# EAGLE board 25 (EAGLE 9.7.0)
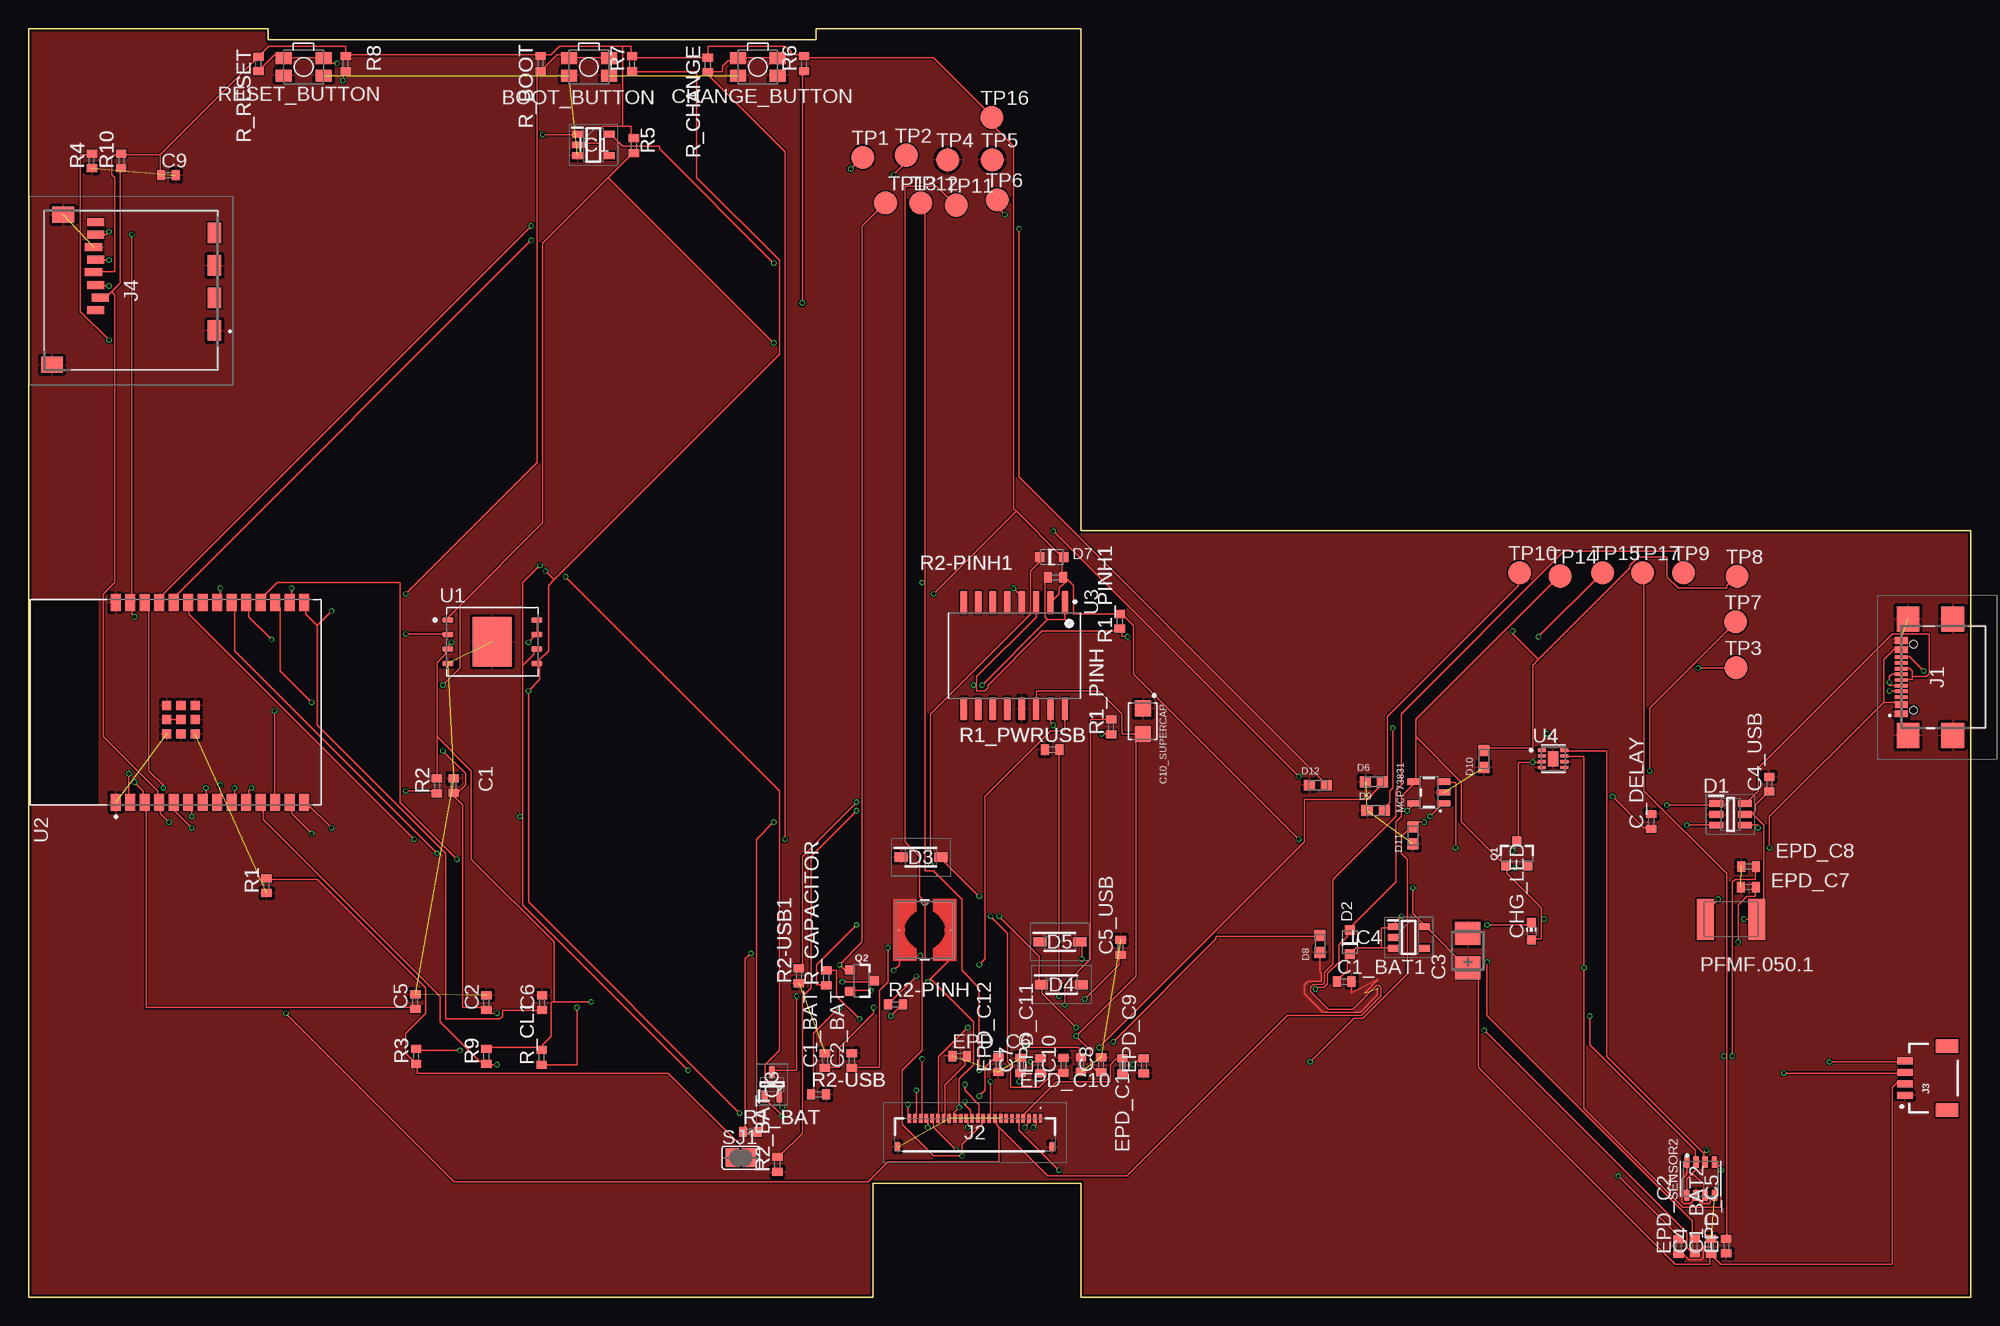
[diagram p0: board, top side]
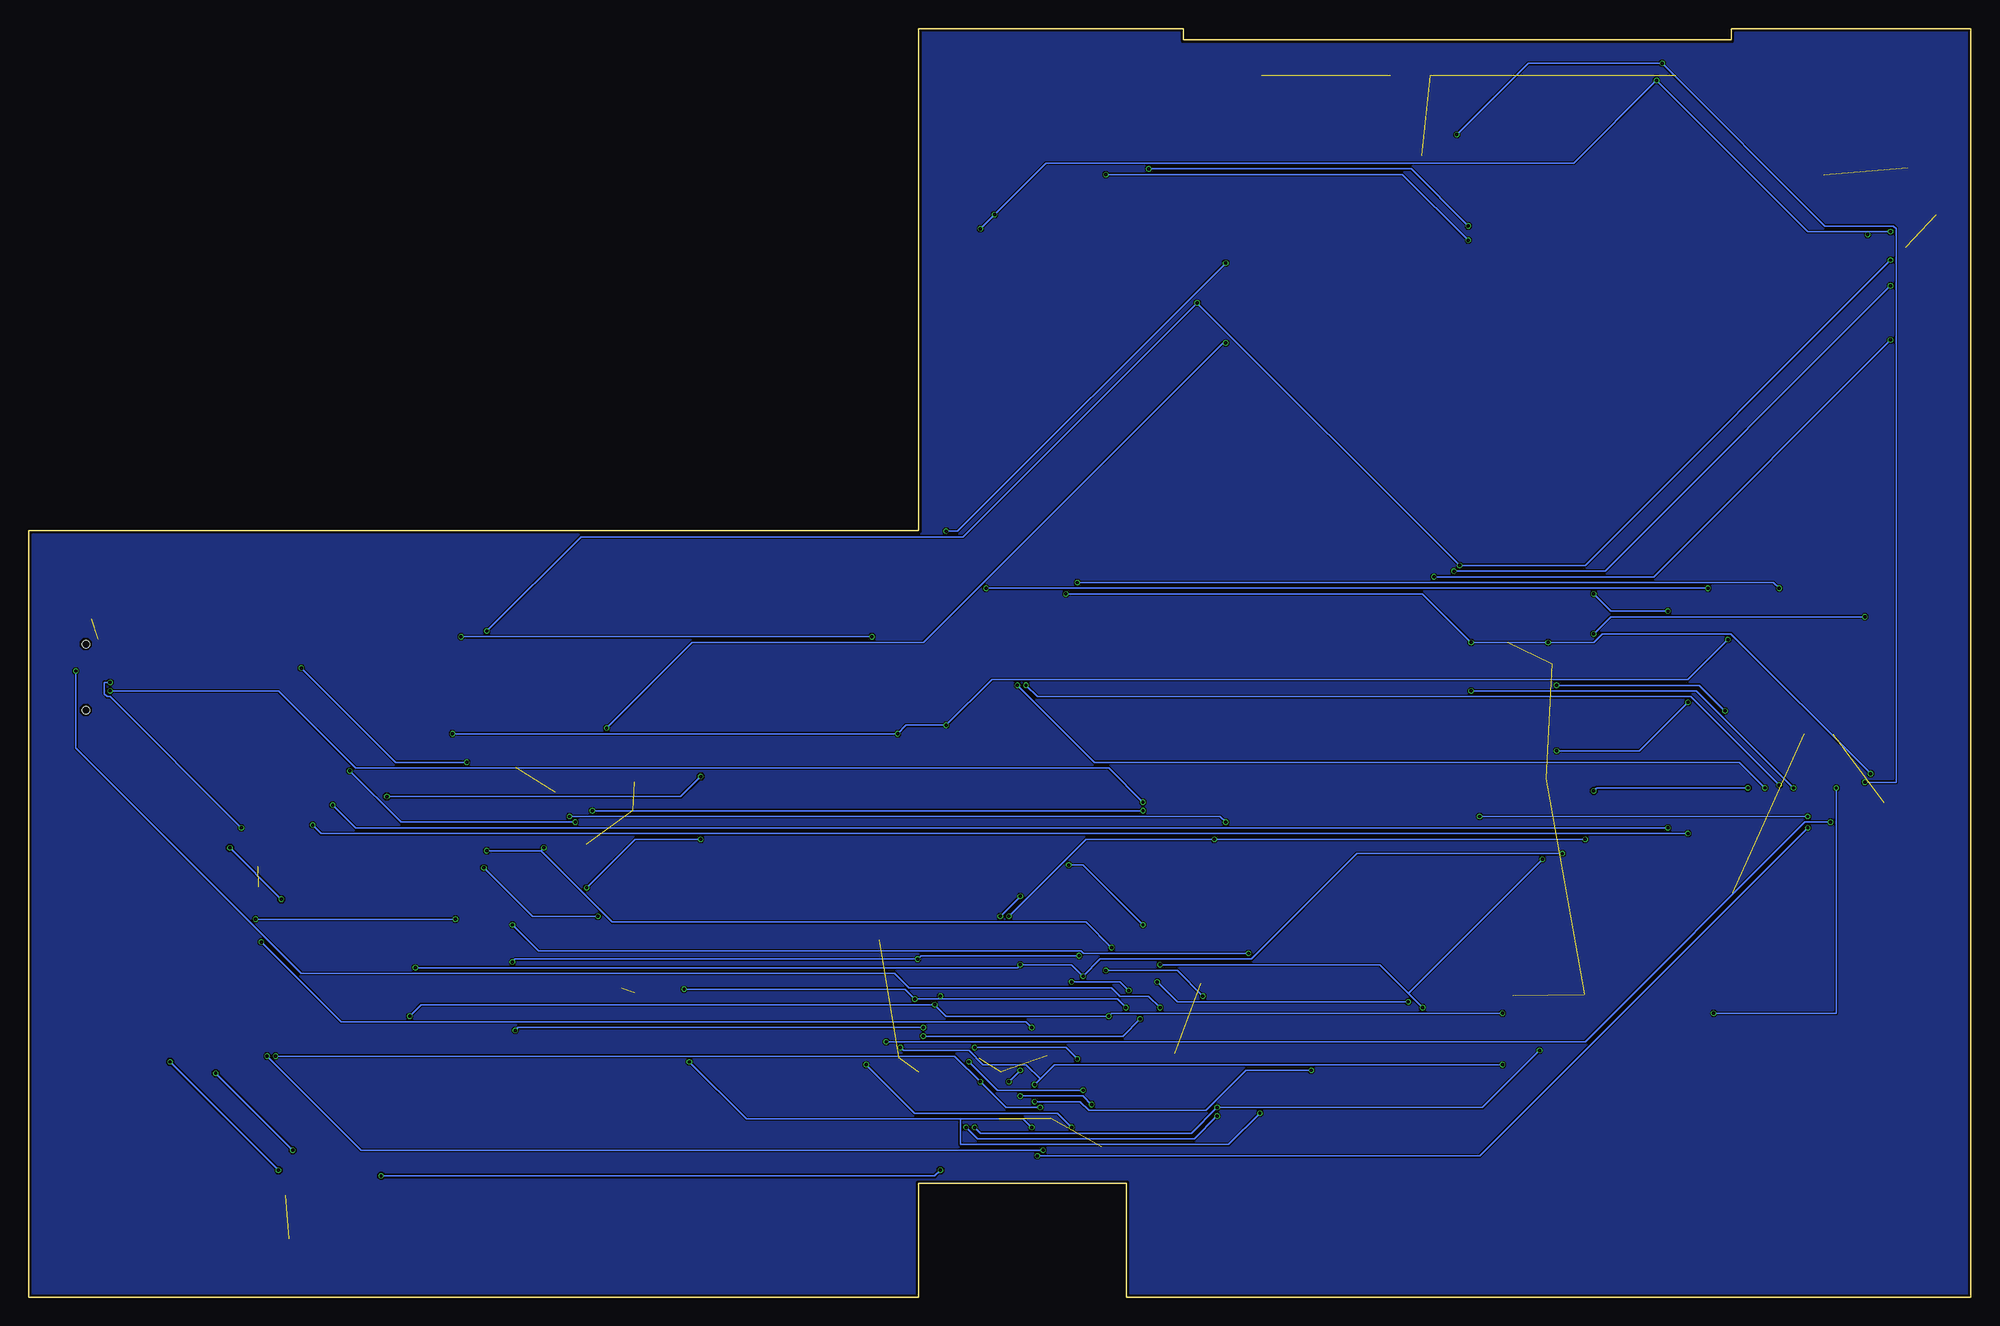
[diagram p1: board, bottom side, seen from below]

Size 170.2 x 111.2 mm. Coordinates in mm from the lower left corner, seen from the top.
Outline: 92.2,111.2 92.2,67.2 170.2,67.2 170.2,0 92.2,0 92.2,10 74,10 74,0 0,0 0,111.2 21,111.2 21,110.2 69,110.2 69,111.2 92.2,111.2
Copper layers (1*16): Top / Bottom
Stack-up Default Layer Stack: Top User Defined 0.035mm / Dielectric-1 User Defined 1.6mm / Bottom User Defined 0.035mm
Design rules: minimum copper width 5mil, minimum drill size 0.3mm, copper clearance wire_polygon to wire_polygon 5mil, copper clearance wire_polygon to pad_smd 5mil, copper clearance wire_polygon to via 5mil, copper clearance pad_smd to pad_smd 5mil, copper clearance pad_smd to via 5mil, copper clearance via to via 5mil, copper clearance smd to pad (same net) 5mil, copper clearance smd to via (same net) 5mil, copper clearance smd to smd (same net) 5mil, dimension clearance 0.2mm, via restrict clearance 0mil, restrict clearance 0mil, drill distance 6mil, keepout clearance 0mil

## Footprints (pad centres in the part's own frame; a part is rotated, then mirrored left to right if it is on the bottom)
MYBUTTON = smd 1.4 x 1.05: 1 1.75,0.75; 2 -1.75,0.75; 3 -1.75,-0.75; 4 1.75,-0.75
ESP32_WROVER_EAGLE-LTSPICE_C0402 = smd 0.7 x 0.9: 1 -0.65,0; 2 0.65,0
RCL_CT3528 = smd 2 x 2.2: + -1.5,0; - 1.5,0
EAGLE-LTSPICE_C0402 = smd 0.7 x 0.9: 1 -0.65,0; 2 0.65,0
CAPCP3225X100N = smd 1.4 x 1.4: 1 -1.1,0; 2 1.1,0
ADAFRUIT_CHIP-LED0603 = smd 0.8 x 0.8: A 0,-0.75; C 0,0.75
SOT95P280X145-6N = smd 1.2 x 0.6: 1 -1.25,0.95; 2 -1.25,0; 3 -1.25,-0.95; 4 1.25,-0.95; 5 1.25,0; 6 1.25,0.95
ESP32_WROVER_AVX---SD0805S020S1R0_AVX_SD0805S020S1R0_0 = smd 0.8 x 0.9: 1 -1.05,0; 2 1.05,0
SOD3716X135N = smd 1.15 x 0.8: 1 -1.75,0; 2 1.75,0
DIOC1608X36N = smd 0.97 x 0.94: 1 -0.75,0; 2 0.75,0
SOT95P280X125-5N = smd 0.9 x 0.6: 1 -1.4,0.95; 2 -1.4,0; 3 -1.4,-0.95; 4 1.4,-0.95; 5 1.4,0.95
SOT95P280X120-5N = smd 0.9 x 0.6: 1 -1.4,0.95; 2 -1.4,0; 3 -1.4,-0.95; 4 1.4,-0.95; 5 1.4,0.95
SAMACSYS_PARTS_USB4110GFA = smd 0.3 x 1.15: A1 -3.35,3.678; A4 -2.55,3.678; A5 -1.25,3.678; A6 -0.25,3.678; A7 0.25,3.678; A8 1.25,3.678; A9 2.55,3.678; A12 3.35,3.678; B1 3.05,3.678; B4 2.25,3.678; B5 1.75,3.678; B6 0.75,3.678; B7 -0.75,3.678; B8 -1.75,3.678; B9 -2.25,3.678; B12 -3.05,3.678 | smd 2.18 x 2: MP1 -5.11,-0.827; MP2 5.11,-0.827; MP3 -5.11,3.103; MP4 5.11,3.103 | hole 0.65: -2.89,2.603; 2.89,2.603
FH34SRJ24S05SH99 = smd 0.3 x 0.8: 1 5.75,1.45; 2 5.25,1.45; 3 4.75,1.45; 4 4.25,1.45; 5 3.75,1.45; 6 3.25,1.45; 7 2.75,1.45; 8 2.25,1.45; 9 1.75,1.45; 10 1.25,1.45; 11 0.75,1.45; 12 0.25,1.45; 13 -0.25,1.45; 14 -0.75,1.45; 15 -1.25,1.45; 16 -1.75,1.45; 17 -2.25,1.45; 18 -2.75,1.45; 19 -3.25,1.45; 20 -3.75,1.45; 21 -4.25,1.45; 22 -4.75,1.45; 23 -5.25,1.45; 24 -5.75,1.45 | smd 0.4 x 0.8: MP1 6.75,-1.05; MP2 -6.75,-1.05
JST04_1MM_RA = smd 0.6 x 1.35: 1 -1.5,0; 2 -0.5,0; 3 0.5,0; 4 1.5,0 | smd 1.2 x 2: NC1 2.8,-3.675; NC2 -2.8,-3.675
112ATAARR03ATTEND = smd 1.8 x 1.2: G1 10.6,10.4; G2 4.9,10.4; S1 7.75,10.4; S2 2.05,10.4 | smd 1.4 x 1.9: G3 13.6,-3.85; G4 0.45,-2.85 | smd 0.7 x 1.5: P1 8.8,0; P2 7.7,0.4; P3 6.6,0; P4 5.5,-0.2; P5 4.4,0; P6 3.3,-0.2; P7 2.2,0; P8 1.1,0
IND_4828-WE-TPC_WRE = smd 0.127 x 0.127: 1 -2.286,0; 2 2.286,0
ESP32_WROVER_SPARKFUN-IC-POWER_SOT23-5 = smd 0.55 x 1.2: 1 -0.95,-1.3; 2 0,-1.3; 3 0.95,-1.3; 4 0.95,1.3; 5 -0.95,1.3
ESP32C6_VARISTOR_CT/CN1812 = smd 1.5 x 3.6: 1 -2.25,0; 2 2.25,0
ESP32_WROVER_SPARKFUN-DISCRETESEMI_SOT23-3 = smd 0.8 x 0.9: 1 -0.95,-1; 2 0.95,-1; 3 0,1.1
SOT65P210X110-3N = smd 1.05 x 0.5: 1 -1.05,0.65; 2 -1.05,-0.65; 3 1.05,0
ESP32_WROVER_EAGLE-LTSPICE_R0402 = smd 0.7 x 0.9: 1 -0.65,0; 2 0.65,0
ESP32_WROVER_BME680_PSON80P300X300X100-8N = smd 1.016 x 0.5: 1 1.458,1.2; 2 1.458,0.4; 3 1.458,-0.4; 4 1.458,-1.2; 5 -1.458,-1.22; 6 -1.458,-0.4; 7 -1.458,0.4; 8 -1.458,1.2
SJ = smd 1.168 x 1.6: 1 -0.762,0; 2 0.762,0
TP20R = smd 2 x 2: TP 0,0
SON127P600X800X80-9N = smd 0.94 x 0.44: 1 -3.895,1.905; 2 -3.895,0.635; 3 -3.895,-0.635; 4 -3.895,-1.905; 5 3.895,-1.905; 6 3.895,-0.635; 7 3.895,0.635; 8 3.895,1.905 | smd 3.4 x 4.3: 9 0,0
XCVR_ESP32-C6-WROOM-1-N8 = smd 1.5 x 0.9: 1 -8.75,5.26; 2 -8.75,3.99; 3 -8.75,2.72; 4 -8.75,1.45; 5 -8.75,0.18; 6 -8.75,-1.09; 7 -8.75,-2.36; 8 -8.75,-3.63; 9 -8.75,-4.9; 10 -8.75,-6.17; 11 -8.75,-7.44; 12 -8.75,-8.71; 13 -8.75,-9.98; 14 -8.75,-11.25; 15 8.75,-11.25; 16 8.75,-9.98; 17 8.75,-8.71; 18 8.75,-7.44; 19 8.75,-6.17; 20 8.75,-4.9; 21 8.75,-3.63; 22 8.75,-2.36; 23 8.75,-1.09; 24 8.75,0.18; 25 8.75,1.45; 26 8.75,2.72; 27 8.75,3.99; 28 8.75,5.26 | smd 0.8 x 0.8: 29_1 -2.755,0.79; 29_2 -1.505,0.79; 29_3 -0.255,0.79; 29_4 -2.755,-0.46; 29_5 -1.505,-0.46; 29_6 -0.255,-0.46; 29_7 -2.755,-1.71; 29_8 -1.505,-1.71; 29_9 -0.255,-1.71
SOIC127P1032X265-16N = smd 2.05 x 0.59: 1 -4.655,4.445; 2 -4.655,3.175; 3 -4.655,1.905; 4 -4.655,0.635; 5 -4.655,-0.635; 6 -4.655,-1.905; 7 -4.655,-3.175; 8 -4.655,-4.445; 9 4.655,-4.445; 10 4.655,-3.175; 11 4.655,-1.905; 12 4.655,-0.635; 13 4.655,0.635; 14 4.655,1.905; 15 4.655,3.175; 16 4.655,4.445
SON50P200X200X80-9N = smd 0.76 x 0.27: 1 -0.985,0.75; 2 -0.985,0.25; 3 -0.985,-0.25; 4 -0.985,-0.75; 5 0.985,-0.75; 6 0.985,-0.25; 7 0.985,0.25; 8 0.985,0.75 | smd 0.9 x 1.3: 9 0,0

## Placement (x,y rotation side)
BOOT_BUTTON  [MYBUTTON]  49.1,107.83 180 top
C1  100nF  [ESP32_WROVER_EAGLE-LTSPICE_C0402]  37.24,44.84 90 top
C1_BAT  4.7uF  [ESP32_WROVER_EAGLE-LTSPICE_C0402]  69.78,20.76 90 top
C1_BAT1  4.7uF  [ESP32_WROVER_EAGLE-LTSPICE_C0402]  115.28,27.68 0 top
C1_BAT2  4.7uF  [ESP32_WROVER_EAGLE-LTSPICE_C0402]  147.42,4.48 90 top
C2  100nF  [ESP32_WROVER_EAGLE-LTSPICE_C0402]  40.12,25.84 90 top
C2_BAT  4.7uF  [ESP32_WROVER_EAGLE-LTSPICE_C0402]  72.14,20.76 90 top
C3  100uF TANT  [RCL_CT3528]  126.1,30.39 90 top
C4  4.7uF/25V  [ESP32_WROVER_EAGLE-LTSPICE_C0402]  146.01,4.5 90 top
C4_USB  100nF  [EAGLE-LTSPICE_C0402]  152.53,44.98 90 top
C5  1uF  [ESP32_WROVER_EAGLE-LTSPICE_C0402]  33.89,25.92 90 top
C5_USB  4.7uF  [EAGLE-LTSPICE_C0402]  95.69,30.68 90 top
C6  100nF  [ESP32_WROVER_EAGLE-LTSPICE_C0402]  45,25.84 90 top
C7  10uF  [ESP32_WROVER_EAGLE-LTSPICE_C0402]  86.94,20.34 90 top
C8  100nF  [ESP32_WROVER_EAGLE-LTSPICE_C0402]  93.98,20.39 90 top
C9  100nF  [EAGLE-LTSPICE_C0402]  12.26,98.34 0 top
C10  100nF  [ESP32_WROVER_EAGLE-LTSPICE_C0402]  90.69,20.34 90 top
C10_SUPERCAP  CPH3225A  [CAPCP3225X100N]  97.64,50.5 270 top
C_DELAY  100nF  [ESP32_WROVER_EAGLE-LTSPICE_C0402]  142.17,41.7 90 top
CHANGE_BUTTON  [MYBUTTON]  63.9,107.83 180 top
CHG_LED  [ADAFRUIT_CHIP-LED0603]  131.68,32.1 0 top
D1  USBLC6-2SC6Y  [SOT95P280X145-6N]  149.13,42.33 0 top
D2  ESP32_WROVER_AVX---SD0805S020S1R0_AVX_SD0805S020S1R0_0_0AVX_SD0805S020S1R0_0_0  [ESP32_WROVER_AVX---SD0805S020S1R0_AVX_SD0805S020S1R0_0]  115.79,31.14 90 top
D3  MBR0530  [SOD3716X135N]  78.19,38.58 0 top
D4  MBR0530  [SOD3716X135N]  90.52,27.41 0 top
D5  MBR0530  [SOD3716X135N]  90.36,31.16 0 top
D6  PGB1010603MR  [DIOC1608X36N]  117.88,45.18 0 top
D7  ESP32_WROVER_AVX---SD0805S020S1R0_AVX_SD0805S020S1R0_0_0AVX_SD0805S020S1R0_0_0  [ESP32_WROVER_AVX---SD0805S020S1R0_AVX_SD0805S020S1R0_0]  89.66,64.89 0 top
D8  PGB1010603MR  [DIOC1608X36N]  113.16,30.98 90 top
D9  PGB1010603MR  [DIOC1608X36N]  118.04,42.68 0 top
D10  PGB1010603MR  [DIOC1608X36N]  127.52,47.18 90 top
D11  PGB1010603MR  [DIOC1608X36N]  121.3,40.48 90 top
D12  PGB1010603MR  [DIOC1608X36N]  112.98,44.88 0 top
EPD_C1  1uF/50V  [ESP32_WROVER_EAGLE-LTSPICE_C0402]  95.85,20.31 90 top
EPD_C2  1uF/50V  [ESP32_WROVER_EAGLE-LTSPICE_C0402]  144.58,4.46 90 top
EPD_C5  0.1uF/50V  [ESP32_WROVER_EAGLE-LTSPICE_C0402]  148.75,4.5 90 top
EPD_C6  1uF/50V  [ESP32_WROVER_EAGLE-LTSPICE_C0402]  81.59,21.16 0 top
EPD_C7  1uF/50V  [ESP32_WROVER_EAGLE-LTSPICE_C0402]  150.7,35.96 0 top
EPD_C8  1uF/50V  [ESP32_WROVER_EAGLE-LTSPICE_C0402]  150.71,37.76 0 top
EPD_C9  1uF/50V  [ESP32_WROVER_EAGLE-LTSPICE_C0402]  97.72,20.31 90 top
EPD_C10  1uF/50V  [ESP32_WROVER_EAGLE-LTSPICE_C0402]  92.21,20.4 90 top
EPD_C11  1uF/50V  [ESP32_WROVER_EAGLE-LTSPICE_C0402]  88.69,20.29 90 top
EPD_C12  1uF/50V  [ESP32_WROVER_EAGLE-LTSPICE_C0402]  85,20.41 90 top
IC1  BD5229G-TR  [SOT95P280X125-5N]  49.5,101 0 top
IC4  XC6220A331MR-G  [SOT95P280X120-5N]  120.94,31.55 0 top
J1  SAMACSYS_PARTS_USB4110-GF-A  [SAMACSYS_PARTS_USB4110GFA]  167.78,54.36 90 top
J2  FH34SRJ-24S-0.5SH_99_  [FH34SRJ24S05SH99]  82.92,14.25 0 top
J3  QWIIC_RIGHT_ANGLE  [JST04_1MM_RA]  164.43,19.22 90 top
J4  112A-TAAR-R03_ATTEND  [112ATAARR03ATTEND]  5.89,95.33 270 top
L1  744043680IND_4828-WE-TPC_WRE  [IND_4828-WE-TPC_WRE]  78.53,32.2 0 top
MCP73831  ESP32_WROVER_SPARKFUN-IC-POWER_MCP73831  [ESP32_WROVER_SPARKFUN-IC-POWER_SOT23-5]  122.7,44.25 90 top
PFMF.050.1  ESP32C6_VARISTORCN1812  [ESP32C6_VARISTOR_CT/CN1812]  149.18,33.14 0 top
Q1  20V/4.2A/52mΩ/1.4W  [ESP32_WROVER_SPARKFUN-DISCRETESEMI_SOT23-3]  130.41,38.86 0 top
Q2  20V/4.2A/52mΩ/1.4W  [ESP32_WROVER_SPARKFUN-DISCRETESEMI_SOT23-3]  72.98,27.76 270 top
Q3  SI1308EDL-T1-GE3  [SOT65P210X110-3N]  65.14,18.66 90 top
R1  [ESP32_WROVER_EAGLE-LTSPICE_R0402]  20.85,36.08 90 top
R1_BAT  200  [ESP32_WROVER_EAGLE-LTSPICE_R0402]  63.25,14.51 0 top
R1_PINH  10K  [ESP32_WROVER_EAGLE-LTSPICE_R0402]  94.86,49.98 90 top
R1_PINH1  10K  [ESP32_WROVER_EAGLE-LTSPICE_R0402]  95.61,59.25 90 top
R1_PWRUSB  100k  [ESP32_WROVER_EAGLE-LTSPICE_R0402]  89.7,48 0 top
R2  [ESP32_WROVER_EAGLE-LTSPICE_R0402]  35.79,44.83 90 top
R2-PINH  10K  [ESP32_WROVER_EAGLE-LTSPICE_R0402]  75.97,25.68 0 top
R2-PINH1  10K  [ESP32_WROVER_EAGLE-LTSPICE_R0402]  89.98,63.1 0 top
R2-USB  5k1  [ESP32_WROVER_EAGLE-LTSPICE_R0402]  69.23,17.79 0 top
R2-USB1  5k1  [ESP32_WROVER_EAGLE-LTSPICE_R0402]  67.5,28.18 90 top
R2_BAT  2K  [ESP32_WROVER_EAGLE-LTSPICE_R0402]  65.61,11.66 90 top
R3  0.47  [ESP32_WROVER_EAGLE-LTSPICE_R0402]  33.96,21.14 90 top
R4  10K  [ESP32_WROVER_EAGLE-LTSPICE_R0402]  5.55,99.59 90 top
R5  10K  [ESP32_WROVER_EAGLE-LTSPICE_R0402]  53.04,100.92 90 top
R6  10K  [ESP32_WROVER_EAGLE-LTSPICE_R0402]  67.96,108.11 90 top
R7  10K  [ESP32_WROVER_EAGLE-LTSPICE_R0402]  52.88,108.11 90 top
R8  10K  [ESP32_WROVER_EAGLE-LTSPICE_R0402]  27.8,108.11 90 top
R9  10K  [ESP32_WROVER_EAGLE-LTSPICE_R0402]  40.12,21.12 90 top
R10  10K  [ESP32_WROVER_EAGLE-LTSPICE_R0402]  8.13,99.59 90 top
R_BOOT  10K  [ESP32_WROVER_EAGLE-LTSPICE_R0402]  44.86,108.11 90 top
R_CAPACITOR  15  [ESP32_WROVER_EAGLE-LTSPICE_R0402]  69.9,28 90 top
R_CHANGE  10K  [ESP32_WROVER_EAGLE-LTSPICE_R0402]  59.52,108 90 top
R_CL1  10K  [ESP32_WROVER_EAGLE-LTSPICE_R0402]  44.96,21.04 90 top
R_RESET  10K  [ESP32_WROVER_EAGLE-LTSPICE_R0402]  20.14,108.1 90 top
RESET_BUTTON  [MYBUTTON]  24.1,107.83 180 top
SENSOR2  BME688  [ESP32_WROVER_BME680_PSON80P300X300X100-8N]  146.51,10.4 90 top
SJ1  [SJ]  62.42,12.25 0 top
TP1  TPTP20R  [TP20R]  73.11,99.92 0 top
TP2  TPTP20R  [TP20R]  76.89,100.1 0 top
TP3  TPTP20R  [TP20R]  149.61,55.2 0 top
TP4  TPTP20R  [TP20R]  80.53,99.7 0 top
TP5  TPTP20R  [TP20R]  84.45,99.7 0 top
TP6  TPTP20R  [TP20R]  84.87,96.2 0 top
TP7  TPTP20R  [TP20R]  149.59,59.2 0 top
TP8  TPTP20R  [TP20R]  149.71,63.2 0 top
TP9  TPTP20R  [TP20R]  145.03,63.5 0 top
TP10  TPTP20R  [TP20R]  130.64,63.52 0 top
TP11  TPTP20R  [TP20R]  81.29,95.72 0 top
TP12  TPTP20R  [TP20R]  78.19,95.92 0 top
TP13  TPTP20R  [TP20R]  75.09,95.92 0 top
TP14  TPTP20R  [TP20R]  134.19,63.22 0 top
TP15  TPTP20R  [TP20R]  137.94,63.52 0 top
TP16  TPTP20R  [TP20R]  84.39,103.42 0 top
TP17  TPTP20R  [TP20R]  141.44,63.52 0 top
U1  W25Q512JVEIQ  [SON127P600X800X80-9N]  40.63,57.46 0 top
U2  ESP32-C6-WROOM-1-N8  [XCVR_ESP32-C6-WROOM-1-N8]  12.9,52.14 90 top
U3  DS3231SN#  [SOIC127P1032X265-16N]  86.39,56.25 270 top
U4  MAX17048G+T10  [SON50P200X200X80-9N]  133.59,47.2 0 top

## Library data of the parts
BOOT_BUTTON CHANGE_BUTTON CHG_LED PFMF.050.1 RESET_BUTTON SJ1 TP1-TP17 = DeskAssistant v19 v1
C1 C1_BAT C1_BAT1 C1_BAT2 C2 C2_BAT C4 C4_USB C5 C5_USB C6-C10 C_DELAY EPD_C1 EPD_C2 EPD_C5-EPD_C12 = DeskAssistant v19 v1; SPICEMODEL: NONE; SPICEPREFIX: C
C3 = DeskAssistant v19 v1; SPICEPREFIX: C
C10_SUPERCAP = DeskAssistant v19 v1; AVAILABILITY: Not in stock; CHECK_PRICES: https://www.snapeda.com/parts/CPH3225A/Seiko+Instruments/view-part/?ref=eda; DESCRIPTION: 11 mF (EDLC) Supercapacitor 3.3 V 1210 (3225 Metric) - -; MF: Seiko Instruments; MP: CPH3225A; PACKAGE: 1210 Seiko; PRICE: None; PURCHASE-URL: https://www.snapeda.com/api/url_track_click_mouser/?unipart_id=562593&manufacturer=Seiko Instruments&part_name=CPH3225A&search_term=None; SNAPEDA_LINK: https://www.snapeda.com/parts/CPH3225A/Seiko+Instruments/view-part/?ref=snap
D1 = DeskAssistant v19 v1; AVAILABILITY: In Stock; CHECK_PRICES: https://www.snapeda.com/parts/USBLC6-2SC6Y/STMicroelectronics/view-part/?ref=eda; DESCRIPTION: 17V Clamp 5A (8/20µs) Ipp Tvs Diode Surface Mount SOT-23-6; MF: STMicroelectronics; MP: USBLC6-2SC6Y; PACKAGE: SOT-23-6 STMicroelectronics; PRICE: None; SNAPEDA_LINK: https://www.snapeda.com/parts/USBLC6-2SC6Y/STMicroelectronics/view-part/?ref=snap
D2 D7 = DeskAssistant v19 v1; CENTROID_NOT_SPECIFIED: No; DATASHEET: http://datasheets.avx.com/schottky.pdf; DIGIKEY_DESCRIPTION: DIODE SCHOTTKY 20V 1A 0805; DIGIKEY_PART_NUMBER: 478-7800-1-ND; LEAD_FREE: yes; MF: AVX; MOUSER_PART_NUMBER: 581-SD0805S020S1R0; PACKAGE: 0805 (2012 metric); PREFIX: D; ROHS: yes; TEMPERATURE_RANGE_HIGH: +125°C; TEMPERATURE_RANGE_LOW: -55°C
D3-D5 = DeskAssistant v19 v1; AVAILABILITY: In Stock; CHECK_PRICES: https://www.snapeda.com/parts/MBR0530/Onsemi/view-part/?ref=eda; DESCRIPTION: Diode Schottky 30 V 500mA Surface Mount SOD-123; MF: ON Semiconductor; MP: MBR0530; PACKAGE: SOD-123-2 ON Semiconductor; PRICE: None; PURCHASE-URL: https://www.snapeda.com/api/url_track_click_mouser/?unipart_id=179458&manufacturer=ON Semiconductor&part_name=MBR0530&search_term=None; SNAPEDA_LINK: https://www.snapeda.com/parts/MBR0530/Onsemi/view-part/?ref=snap
D6 D8-D12 = DeskAssistant v19 v1; AVAILABILITY: In Stock; CHECK_PRICES: https://www.snapeda.com/parts/PGB1010603MR/Littelfuse/view-part/?ref=eda; DESCRIPTION: 150V (Typ) Clamp - Ipp Tvs Diode Surface Mount 0603 (1608 Metric); MF: Littelfuse Inc.; MP: PGB1010603MR; PACKAGE: 0603 Littelfuse Inc.; PRICE: None; PURCHASE-URL: https://www.snapeda.com/api/url_track_click_mouser/?unipart_id=5659453&manufacturer=Littelfuse Inc.&part_name=PGB1010603MR&search_term=None; SNAPEDA_LINK: https://www.snapeda.com/parts/PGB1010603MR/Littelfuse/view-part/?ref=snap
IC1 = DeskAssistant v19 v1; DESCRIPTION: Voltage Detector with Adjustable Delay Time: CMOS processes are utilized to develop high precision, low current consumption CMOS reset ICs that allow arbitrary setting of the delay time. The extensive lineup includes both Nch Open Drain and CMOS output types in a wide range of detection voltages (from 2.3V to 6.0V, in 0.1V steps), enabling selection of the ideal solution based on customer requirements. In addition, the entire series is of course both lead-free and RoHS-compliant.; HEIGHT: 1.25mm; MANUFACTURER_NAME: ROHM Semiconductor; MANUFACTURER_PART_NUMBER: BD5229G-TR; MOUSER_PART_NUMBER: 755-BD5229G-TR; MOUSER_PRICE-STOCK: https://www.mouser.co.uk/ProductDetail/ROHM-Semiconductor/BD5229G-TR?qs=4kLU8WoGk0vvnhrrYwdszw%3D%3D
IC4 = DeskAssistant v19 v1; DESCRIPTION: LDO Voltage Regulators; HEIGHT: 1.2mm; MANUFACTURER_NAME: Torex; MANUFACTURER_PART_NUMBER: XC6220A331MR-G; MOUSER_PART_NUMBER: 865-XC6220A331MR-G; MOUSER_PRICE-STOCK: https://www.mouser.co.uk/ProductDetail/Torex-Semiconductor/XC6220A331MR-G?qs=AsjdqWjXhJ8ZSWznL1J0gg%3D%3D
J1 = DeskAssistant v19 v1; DESCRIPTION: CONN USB 2.0 TYPE-C R/A SMT; HEIGHT: 3.26mm; MANUFACTURER_NAME: GCT (GLOBAL CONNECTOR TECHNOLOGY); MANUFACTURER_PART_NUMBER: USB4110-GF-A; MOUSER_PART_NUMBER: 640-USB4110-GF-A; MOUSER_PRICE-STOCK: https://www.mouser.co.uk/ProductDetail/GCT/USB4110-GF-A?qs=KUoIvG%2F9IlYiZvIXQjyJeA%3D%3D
J2 = DeskAssistant v19 v1; DESCRIPTION: 24 Position FFC, FPC Connector Contacts, Top and Bottom 0.020" (0.50mm) Surface Mount, Right Angle; HEIGHT: 1.1mm; MANUFACTURER_NAME: Hirose; MANUFACTURER_PART_NUMBER: FH34SRJ-24S-0.5SH(99); MOUSER_PART_NUMBER: 798-FH34SRJ24S05SH99; MOUSER_PRICE-STOCK: https://www.mouser.co.uk/ProductDetail/Hirose-Connector/FH34SRJ-24S-0.5SH99?qs=vcbW%252B4%252BSTIpKBl5ap9J8Fw%3D%3D
J3 = DeskAssistant v19 v1; PROD_ID: CONN-13694
J4 = DeskAssistant v19 v1; DESCRIPTION: Micro SD Card Socket, Push-Push Type, Top Mount, SMT, H=1.83mm, 10u; HEIGHT: 1.9mm; MANUFACTURER_NAME: ATTEND; MANUFACTURER_PART_NUMBER: 112A-TAAR-R03 ATTEND
L1 = DeskAssistant v19 v1; COPYRIGHT: Copyright (C) 2024 Ultra Librarian. All rights reserved.; MANUFACTURER_PART_NUMBER: 744043680; MFR_NAME: Wurth Electronics
MCP73831 = DeskAssistant v19 v1; PROD_ID: IC-09995
Q1 Q2 = DeskAssistant v19 v1; PROD_ID: TRAN-14388
Q3 = DeskAssistant v19 v1; AVAILABILITY: In Stock; CHECK_PRICES: https://www.snapeda.com/parts/SI1308EDL-T1-GE3/Vishay+Siliconix/view-part/?ref=eda; DESCRIPTION: Si1308EDL-T1-GE3 N-channel MOSFET Transistor, 1.5 A, 30 V, 3-Pin SC-70 | Siliconix / Vishay SI1308EDL-T1-GE3; MF: Vishay Siliconix; MP: SI1308EDL-T1-GE3; PACKAGE: SOT-323 Vishay Semiconductor; PRICE: None; PURCHASE-URL: https://www.snapeda.com/api/url_track_click_mouser/?unipart_id=274603&manufacturer=Vishay Siliconix&part_name=SI1308EDL-T1-GE3&search_term=None; SNAPEDA_LINK: https://www.snapeda.com/parts/SI1308EDL-T1-GE3/Vishay+Siliconix/view-part/?ref=snap
R1 R1_BAT R1_PINH R1_PINH1 R1_PWRUSB R2 R2-PINH R2-PINH1 R2-USB R2-USB1 R2_BAT R3-R10 R_BOOT R_CAPACITOR R_CHANGE R_CL1 R_RESET = DeskAssistant v19 v1; SPICEMODEL: NONE; SPICEPREFIX: R
SENSOR2 = DeskAssistant v19 v1; AVAILABILITY: Unavailable; DESCRIPTION: Integrated Environmental Unit; MF: Bosch Sensortec; MP: BME680; PACKAGE: LGA-8 Bosch Tools; PRICE: None
U1 = DeskAssistant v19 v1; AVAILABILITY: In Stock; CHECK_PRICES: https://www.snapeda.com/parts/W25Q512JVEIQ/Winbond+Electronics/view-part/?ref=eda; DESCRIPTION: FLASH - NOR Memory IC 512Mb (64M x 8) SPI - Quad I/O 133 MHz 8-WSON (8x6); MF: Winbond Electronics; MP: W25Q512JVEIQ; PACKAGE: Package; PRICE: None; SNAPEDA_LINK: https://www.snapeda.com/parts/W25Q512JVEIQ/Winbond+Electronics/view-part/?ref=snap
U2 = DeskAssistant v19 v1; AVAILABILITY: In Stock; CHECK_PRICES: https://www.snapeda.com/parts/ESP32-C6-WROOM-1-N8/Espressif+Systems/view-part/?ref=eda; DESCRIPTION: Multiprotocol Modules ESP32-C6 module, Wi-Fi 6 in 2.4 GHz band, Bluetooth 5, Zigbee 3.0 and Thread. ESP34-WROOM Compatible - ENGINEERING SAMPLE; MF: Espressif Systems; MP: ESP32-C6-WROOM-1-N8; PACKAGE: None; PRICE: None; SNAPEDA_LINK: https://www.snapeda.com/parts/ESP32-C6-WROOM-1-N8/Espressif+Systems/view-part/?ref=snap
U3 = DeskAssistant v19 v1; AVAILABILITY: In Stock; CHECK_PRICES: https://www.snapeda.com/parts/DS3231SN%23/Analog+Devices/view-part/?ref=eda; DESCRIPTION: Extremely Accurate I²C-Integrated RTC/TCXO/Crystal; MF: Analog Devices; MP: DS3231SN#; PACKAGE: SOIC-16 Maxim; PRICE: None; PURCHASE-URL: https://www.snapeda.com/api/url_track_click_mouser/?unipart_id=99048&manufacturer=Analog Devices&part_name=DS3231SN#&search_term=None; SNAPEDA_LINK: https://www.snapeda.com/parts/DS3231SN%23/Analog+Devices/view-part/?ref=snap
U4 = DeskAssistant v19 v1; AVAILABILITY: In Stock; CHECK_PRICES: https://www.snapeda.com/parts/MAX17048G+T10/Analog+Devices/view-part/?ref=eda; DESCRIPTION: 3µA 1-Cell/2-Cell Fuel Gauge with ModelGauge; MF: Analog Devices; MP: MAX17048G+T10; PACKAGE: TDFN-8 Maxim; PRICE: None; PURCHASE-URL: https://www.snapeda.com/api/url_track_click_mouser/?unipart_id=329239&manufacturer=Analog Devices&part_name=MAX17048G+T10&search_term=None; SNAPEDA_LINK: https://www.snapeda.com/parts/MAX17048G+T10/Analog+Devices/view-part/?ref=snap

## Nets
3V3: C1_BAT2.1 C3.+ C9.1 D7.2 IC1.2 IC4.5 J3.2 J4.P4 Q2.3 R1_PINH1.2 R2-PINH1.2 R2.2 R5.2 R6.2 R7.2 R8.2 R9.2 R10.2 R_BOOT.2 R_CHANGE.2 R_CL1.2 R_RESET.2 TP16.TP U1.3 U1.7 U1.8 U2.2 U3.2
32KHZ: R2-PINH1.1 U2.9 U3.1
DN: D1.4 J1.A7 J1.B7
DP: D1.6 J1.A6 J1.B6
EPD_3V3: C7.1 EPD_C5.2 J2.15 J2.16 L1.2 Q2.2 TP17.TP
EPD_3V3_C: Q2.1 R_CL1.1 TP13.TP U2.18
EPD_BUSY: J2.9 TP9.TP U2.26
EPD_CS: D6.2 J2.12 R9.1 TP10.TP U2.11
EPD_DC: J2.11 TP11.TP U2.5
EPD_RST: J2.10 TP12.TP U2.21
FLASH_CS: D9.2 R5.1 U1.1 U2.12
GDR: J2.2 Q3.1 R4.2
GND: BOOT_BUTTON.1 BOOT_BUTTON.2 C1.2 C1_BAT1.2 C1_BAT2.2 C1_BAT.2 C2.2 C2_BAT.2 C3.- C4_USB.2 C5.2 C5_USB.2 C6.2 C7.2 C8.2 C9.2 C10.2 C10_SUPERCAP.1 C_DELAY.2 CHANGE_BUTTON.1 CHANGE_BUTTON.2 D1.2 D3.1 D6.1 D8.1 D9.1 D10.1 D11.1 D12.1 EPD_C1.1 EPD_C2.1 EPD_C5.1 EPD_C6.1 EPD_C7.1 EPD_C8.1 EPD_C9.1 EPD_C10.1 EPD_C11.1 EPD_C12.1 IC1.3 IC4.2 J1.A1 J1.A12 J1.B1 J1.B12 J1.MP1 J1.MP2 J1.MP3 J1.MP4 J2.8 J2.17 J2.MP1 J2.MP2 J3.1 J4.G1 J4.G2 J4.G3 J4.G4 J4.P6 MCP73831.2 R1.1 R1_PWRUSB.1 R2-USB1.1 R2-USB.2 R2_BAT.1 R4.1 RESET_BUTTON.1 RESET_BUTTON.2 SENSOR2.1 SENSOR2.5 SENSOR2.7 SJ1.1 TP4.TP TP5.TP U1.4 U1.9 U2.1 U2.28 U2.29_1 U2.29_2 U2.29_3 U2.29_4 U2.29_5 U2.29_6 U2.29_7 U2.29_8 U2.29_9 U3.13 U4.1 U4.4 U4.6 U4.9
GPIOB: R2.1 U2.10
I2C_PW: C1.1 C2.1 R1_PINH.2 R2-PINH.2 SENSOR2.2 SENSOR2.6 SENSOR2.8 U2.17
INT_RTC: R1_PINH1.1 TP15.TP U2.8 U3.3
IO/BOOT: BOOT_BUTTON.3 BOOT_BUTTON.4 C6.1 R_BOOT.1 U2.15
IO/CHANGE: C10.1 CHANGE_BUTTON.3 CHANGE_BUTTON.4 R_CHANGE.1 U2.23
MISO: D12.2 J4.P7 R8.1 TP6.TP U1.2 U2.27
MOSI: D11.2 J2.14 J4.P3 R7.1 TP7.TP U1.5 U2.7
N$2: C1_BAT1.1 D2.1 IC4.1 IC4.3 Q1.2
N$3: J1.A5 R2-USB1.2
N$4: J1.B5 R2-USB.1
N$5: C4.1 D3.2 D4.1
N$7: EPD_C12.2 J2.24
N$8: CHG_LED.C R1_BAT.1
N$9: MCP73831.1 R1_BAT.2
N$10: MCP73831.5 R2_BAT.2
N$11: EPD_C11.2 J2.23
N$12: EPD_C10.2 J2.22
N$13: EPD_C9.2 J2.21
N$14: EPD_C8.2 J2.20
N$15: EPD_C7.2 J2.19
N$16: EPD_C6.2 J2.18
N$18: C_DELAY.1 IC1.5
N$24: EPD_C2.2 J2.5
N$25: D7.1 R_CAPACITOR.1
N$26: EPD_C1.2 J2.4
PREVGH: D5.1
PREVGL: D4.2
RESE: J2.3 Q3.2 R3.2
RESE': R1.2 R3.1 SJ1.2
RESET: C5.1 IC1.1 R_RESET.1 RESET_BUTTON.3 RESET_BUTTON.4 U2.3
RTC_RST: U2.16 U3.4
RX: TP2.TP U2.24
SCK: D10.2 J2.13 J4.P5 R6.1 TP8.TP U1.6 U2.6
SCL: J3.4 R2-PINH.1 SENSOR2.4 U2.20 U3.16 U4.7
SDA: J3.3 R1_PINH.1 SENSOR2.3 U2.19 U3.15 U4.8
SRC: C4.2 D5.2 L1.1 Q3.3
SS_SD: D8.2 J4.P2 R10.1 U2.4
TX: TP1.TP U2.25
USB_D+: D1.1 U2.14
USB_D-: D1.3 U2.13
VBAT: C2_BAT.1 MCP73831.3 Q1.3 TP3.TP U4.2 U4.3
VBUS: C1_BAT.1 C4_USB.1 C5_USB.1 CHG_LED.A D1.5 D2.2 MCP73831.4 PFMF.050.1.2 Q1.1 R1_PWRUSB.2 TP14.TP
VRTC: C8.1 C10_SUPERCAP.2 R_CAPACITOR.2 U3.14
VUSB: J1.A4 J1.A9 J1.B4 J1.B9 PFMF.050.1.1

## Tracks (layer width: path | path; a pad name or v marks a point on that pad's centre or on a via)
3V3  (via drill 0.3)
  Top 0.127: R9.2 40.3,21.9 44.8,21.9 R_CL1.2 45.05,21.9 45.05,22.15 45.8,22.9 45.8,25.9 46.05,25.9 | v71.3,27.65 74.05,27.65 Q2.3 | 46.05,25.9 v49.3,25.9 | U1.8 44.55,59.15 44.55,58.15 U1.7 44.3,57.9 v43.8,57.4 | 35.8,49.15 35.8,55.65 36.55,56.4 36.55,56.65 U1.3 36.8,56.9 36.8,57.15 v37.05,57.4 | 35.8,49.15 35.8,45.65 R2.2 | v8.8,45.9 8.8,43.4 U2.2 | 46.05,25.9 46.05,31.15 38.8,38.4 38.8,46.15 35.8,49.15 | J3.2 164.3,18.9 163.8,18.9 163.3,18.4 163.3,2.9 148.3,2.9 147.55,3.65 C1_BAT2.1 147.3,3.65 147.3,2.9 144.3,2.9 127.05,20.15 127.05,27.9 126.3,28.65 C3.+ 126.05,28.9 122.55,32.4 IC4.5 122.3,32.65 121.3,33.65 v121.3,35.9 | 11.55,100.15 8.3,100.15 R10.2 8.05,100.15 7.55,100.15 7.3,99.9 7.3,98.4 7.55,98.15 7.55,89.9 5.8,89.9 J4.P4 | 11.55,100.15 11.55,98.4 C9.1 | R2-PINH1.2 90.55,63.15 90.55,64.65 D7.2 90.55,64.9 86.55,68.9 | R2-PINH1.2 90.8,63.15 91.55,62.4 91.55,59.9 R1_PINH1.2 95.8,59.9 96.8,58.9 96.8,54.65 v111.3,40.15 | U3.2 89.8,61.15 90.3,61.65 90.3,62.15 90.8,62.65 90.8,62.9 R2-PINH1.2 | 27.8,108.9 27.8,109.65 21.05,109.65 20.3,108.9 R_RESET.2 20.05,108.65 11.55,100.15 | 52.05,102.65 52.8,102.65 52.8,101.65 R5.2 | 52.05,102.65 50.3,102.65 50.05,102.4 50.05,101.15 48.3,101.15 IC1.2 | 52.05,109.65 52.8,109.65 52.8,108.9 R7.2 53.05,108.65 R_CHANGE.2 59.55,108.65 59.55,109.65 66.3,109.65 66.8,109.15 66.8,108.9 67.8,108.9 R6.2 68.05,108.65 79.3,108.65 84.3,103.65 TP16.TP 84.55,103.4 84.55,102.65 86.3,100.9 86.3,69.15 86.55,68.9 | 52.05,109.65 46.55,109.65 45.8,108.9 45.05,108.9 R_BOOT.2 44.8,108.9 27.8,108.9 | 52.05,109.65 52.05,102.65 | 27.8,108.9 R8.2
  Top 0.127: 86.55,68.9 v79.3,61.65
  Bottom 0.127: v71.3,27.65 69.55,25.9 v49.3,25.9 | v8.8,45.9 21.05,58.15 32.3,58.15 33.05,57.4 v37.05,57.4 v43.8,57.4 48.05,61.65 v79.3,61.65 | v121.3,35.9 117.05,40.15 v111.3,40.15
32KHZ  (via drill 0.3)
  Top 0.127: 89.3,59.4 89.05,59.65 89.05,62.65 89.3,62.9 R2-PINH1.1 | 89.3,59.4 90.8,59.4 90.8,60.9 U3.1 | v18.05,44.65 18.05,43.65 U2.9 | 89.3,59.4 v83.55,53.65
  Bottom 0.127: v18.05,44.65 20.3,46.9 76.8,46.9 v83.55,53.65
DN  (via drill 0.3)
  Top 0.127: J1.B7 164.05,53.65 163.05,53.65 v163.05,53.9 163.05,54.4 163.3,54.65 164.05,54.65 J1.A7 | v151.55,41.15 151.55,41.4 150.55,41.4 D1.4
  Bottom 0.127: v151.55,41.15 163.05,52.65 163.3,52.65 163.55,52.9 163.55,53.9 v163.05,53.9
DP
  Top 0.127: 165.05,54.4 165.05,54.9 164.8,55.15 164.3,55.15 J1.B6 | 165.05,54.4 165.05,54.15 164.3,54.15 J1.A6 | 165.05,54.4 166.3,54.4 166.55,54.65 166.55,58.15 163.3,58.15 151.55,46.4 151.55,44.4 150.55,43.4 D1.6
EPD_3V3  (via drill 0.3)
  Top 0.127: J2.15 81.55,15.9 81.3,15.9 J2.16 81.05,15.9 81.05,16.15 v81.55,16.65 81.55,19.15 82.8,20.4 82.8,24.15 79.05,27.9 | v86.8,18.9 86.8,19.65 C7.1 | v73.8,26.9 72.05,26.9 Q2.2 | 79.05,27.9 80.8,29.65 80.8,32.15 L1.2 | 79.05,27.9 v78.8,27.65 | 148.8,21.15 148.8,37.15 141.55,44.4 141.55,63.4 TP17.TP | 148.8,21.15 148.8,5.15 EPD_C5.2 | 148.8,21.15 v148.55,21.15
  Bottom 0.127: v81.55,16.65 84.55,16.65 v86.8,18.9 89.05,21.15 v148.55,21.15 | v73.8,26.9 74.55,27.65 v78.8,27.65
EPD_3V3_C  (via drill 0.3)
  Top 0.127: v48.05,25.4 48.05,20.4 45.05,20.4 R_CL1.1 | Q2.1 72.05,28.65 72.05,28.4 71.8,28.4 v71.05,29.15 73.05,31.15 73.05,93.9 75.05,95.9 TP13.TP | v37.55,38.4 32.55,43.4 32.55,62.65 21.8,62.65 20.8,61.65 20.8,61.15 20.55,60.9 U2.18
  Bottom 0.127: 49.3,26.65 51.8,29.15 v71.05,29.15 | 49.3,26.65 v48.05,25.4 | 49.3,26.65 v37.55,38.4
EPD_BUSY  (via drill 0.3)
  Top 0.127: 85.05,14.9 89.3,10.65 96.23,10.65 110.31,24.73 116.81,24.73 118.49,26.42 118.49,27.18 118.34,27.34 118.12,27.34 116.04,25.27 113.92,25.27 112.34,26.84 112.34,27.19 112.59,27.43 113.41,27.43 113.57,27.59 113.57,28.49 114.3,29.22 114.3,36.65 119.8,42.15 119.8,44.4 120.3,44.9 120.3,51.15 134.55,65.4 144.55,65.4 144.55,64.65 144.8,64.4 144.8,63.65 TP9.TP | 85.05,14.9 84.8,15.15 84.8,15.65 J2.9 | v11.8,44.65 11.8,44.9 10.55,46.15 10.55,60.4 10.3,60.65 U2.26 | v22.55,24.9 37.3,10.15 73.55,10.15 75.3,11.9 85.05,11.9 85.05,14.9
  Bottom 0.127: v11.8,44.65 11.8,24.9 v22.55,24.9
EPD_CS  (via drill 0.3)
  Top 0.127: TP10.TP 130.55,63.4 130.55,62.4 119.05,50.9 119.05,45.65 118.8,45.4 D6.2 118.55,45.15 118.3,44.9 118.3,44.65 117.3,43.65 111.8,43.65 111.8,39.9 v93.8,21.9 | v82.05,18.65 82.05,18.15 83.3,16.9 83.3,15.9 J2.12 | v41.05,20.4 40.3,20.4 R9.1 40.05,20.65 39.55,20.65 36.05,24.15 36.05,26.4 20.55,41.9 20.55,43.15 U2.11
  Bottom 0.127: 81.55,19.15 80.3,20.4 v41.05,20.4 | 81.55,19.15 v82.05,18.65 | v93.8,21.9 93.55,21.65 87.8,21.65 86.55,20.4 82.8,20.4 81.55,19.15
EPD_DC  (via drill 0.3)
  Top 0.127: v14.3,41.15 12.8,42.65 12.8,43.15 U2.5 | J2.11 83.55,15.65 83.55,15.15 81.8,13.4 v81.8,12.4 79.3,12.4 76.55,15.15 76.55,19.9 78.3,21.65 78.3,29.51 78.57,29.78 78.57,34.63 78.05,35.15 78.05,38.65 76.8,39.9 76.8,97.4 79.55,97.4 81.05,95.9 TP11.TP
  Bottom 0.127: v81.8,12.4 43.05,12.4 v14.3,41.15
EPD_RST  (via drill 0.3)
  Top 0.127: v84.3,18.9 84.3,15.9 J2.10 | v83.3,19.9 83.3,27.15 81.8,28.65 81.8,34.9 79.3,37.4 78.55,37.4 78.55,62.65 | 78.55,62.65 78.55,95.65 78.3,95.9 TP12.TP | v16.8,62.15 16.8,61.15 16.55,60.9 U2.21 | 78.55,62.65 v78.3,62.65
  Bottom 0.127: v83.3,19.9 v84.3,18.9 | v16.8,62.15 17.3,62.65 v78.3,62.65
FLASH_CS  (via drill 0.3)
  Top 0.127: 50.8,98.15 45.05,92.4 45.05,67.9 37.8,60.65 | 50.8,98.15 52.8,100.15 R5.1 | 37.8,60.65 36.8,59.65 36.8,59.4 U1.1 | v119.55,49.9 119.55,44.65 119.3,44.4 119.3,43.4 118.8,42.9 D9.2 | 50.8,98.15 v65.3,83.65 | v21.55,51.4 21.55,43.4 U2.12 | v36.3,53.65 37.8,55.15 37.8,60.65
  Bottom 0.127: v119.55,49.9 112.05,57.4 91.8,57.4 65.55,83.65 v65.3,83.65 | v21.55,51.4 23.8,53.65 v36.3,53.65
GDR  (via drill 0.3)
  Top 0.127: v88.05,14.9 88.3,15.15 88.3,15.65 J2.2 | v66.05,15.9 64.55,17.4 Q3.1 64.55,17.65 64.55,20.4 65.8,21.65 65.8,44.4 v47.05,63.15 | v7.05,83.9 4.55,86.4 4.55,100.15 5.55,100.15 R4.2
  Bottom 0.127: v88.05,14.9 87.05,13.9 68.05,13.9 v66.05,15.9 | v7.05,83.9 27.8,63.15 v47.05,63.15
GND  (25 unrouted)
  Top 0.127: U2.29_5 13.3,50.65 12.3,50.65 U2.29_2
  Top 0.152: D8.1 113.16,28.54 113.3,28.4 113.3,27.7 112.1,27.7 111.8,27.4 111.8,26.6 113.4,25 116.7,25 118.2,26.5 118.2,27.05 118.23,27.07 | EPD_C2.1 144.96,3.81 145.48,3.3 146.54,3.3 146.77,3.52 146.77,4.26 146.89,4.38 147.38,4.38 147.42,4.42 C1_BAT2.2 | EPD_C6.1 80.3,21.2 | C1_BAT1.2 115.9,26.7 118.22,27.86 117.1,26.7 | SENSOR2.5 147.36,8.58 147.36,8.39 147.21,8.23 146.61,8.23 146.46,8.39 146.46,8.6 SENSOR2.7 145.76,8.6 145.76,8.39 145.61,8.23 145.01,8.23 144.86,8.39 144.86,10.33 145.31,10.79 SENSOR2.1
  pour Top: 0.1,111.1 20.9,111.1 20.9,110.1 69.1,110.1 69.1,111.1 92.1,111.1 92.1,67.1 170.1,67.1 170.1,0.1 92.3,0.1 92.3,10.1 73.9,10.1 73.9,0.1 0.1,0.1
  pour Bottom: 0.1,111.1 20.9,111.1 20.9,110.1 69.1,110.1 69.1,111.1 92.1,111.1 92.1,67.1 170.1,67.1 170.1,0.1 92.3,0.1 92.3,10.1 73.9,10.1 73.9,0.1 0.1,0.1
GPIOB  (via drill 0.3)
  Top 0.127: v33.05,44.4 35.55,44.4 R2.1 | v19.55,44.65 19.3,44.4 19.3,43.4 U2.10
  Bottom 0.127: v33.05,44.4 32.8,44.65 v19.55,44.65
I2C_PW  (via drill 0.3)
  Top 0.127: 145.8,10.9 146.05,11.15 146.05,11.65 SENSOR2.2 146.05,11.9 146.05,12.9 136.8,22.15 v136.8,24.65 | 145.8,10.9 145.3,10.4 145.3,9.15 SENSOR2.8 | 145.8,10.9 146.8,9.9 146.8,9.15 SENSOR2.6 | 37.3,43.9 38.05,43.15 38.05,25.4 40.05,25.4 C2.1 40.3,25.15 40.3,24.9 v41.05,24.9 | 37.3,43.9 37.3,44.15 C1.1 37.3,43.9 | v75.55,24.65 76.55,25.65 R2-PINH.2 | v90.8,25.65 90.8,27.4 93.05,29.65 93.05,50.65 94.8,50.65 R1_PINH.2 | v24.8,52.15 22.05,54.9 22.05,60.4 21.8,60.65 U2.17 | v36.3,47.9 38.3,45.9 38.3,44.9 37.3,43.9
  Bottom 0.127: v41.05,24.9 75.3,24.9 v75.55,24.65 89.8,24.65 v90.8,25.65 135.8,25.65 v136.8,24.65 | v24.8,52.15 29.05,47.9 v36.3,47.9
INT_RTC  (via drill 0.3)
  Top 0.127: 83.05,53.65 83.05,54.4 88.3,59.65 U3.3 | 83.05,53.65 83.05,53.15 83.8,53.15 84.05,53.4 84.05,53.65 88.8,58.4 95.55,58.4 R1_PINH1.1 95.8,58.4 95.8,57.9 v96.3,57.9 | v16.8,44.9 16.8,43.65 16.55,43.4 U2.8 | 83.05,53.65 v82.8,53.65 | v132.3,57.9 137.8,63.4 TP15.TP
  Bottom 0.127: v16.8,44.9 24.55,52.65 81.8,52.65 v82.8,53.65 | v96.3,57.9 v132.3,57.9
IO/BOOT  (via drill 0.3)
  Top 0.127: BOOT_BUTTON.3 50.8,108.65 47.55,108.65 BOOT_BUTTON.4 47.3,108.65 47.3,108.9 46.3,108.9 45.05,107.65 R_BOOT.1 44.8,107.4 44.55,107.15 44.55,73.15 v33.05,61.65 | 25.3,58.9 25.3,50.15 36.55,38.9 36.55,24.4 41.3,24.4 41.55,24.65 41.55,25.15 44.8,25.15 C6.1 | 25.3,58.9 24.3,59.9 24.3,60.65 U2.15 | 25.3,58.9 v26.55,60.15
  Bottom 0.127: v33.05,61.65 31.55,60.15 v26.55,60.15
IO/CHANGE  (via drill 0.3)
  Top 0.127: CHANGE_BUTTON.3 65.55,108.65 62.3,108.65 CHANGE_BUTTON.4 62.05,108.4 61.3,108.4 60.8,107.9 60.8,107.4 59.55,107.4 R_CHANGE.1 59.55,107.15 66.3,100.4 v66.3,40.15 | v84.3,33.4 85.8,31.9 85.8,20.65 86.05,20.4 86.05,18.4 88.55,18.4 89.8,19.65 90.55,19.65 C10.1 | v33.8,40.15 14.05,59.9 14.05,60.65 U2.23
  Bottom 0.127: v84.3,33.4 77.55,40.15 v66.3,40.15 v33.8,40.15
MISO  (via drill 0.3)
  Top 0.127: v33.05,58.15 36.55,58.15 U1.2 | v9.3,59.65 9.05,59.9 9.05,60.65 U2.27 9.05,60.9 v9.05,93.15 | v27.55,106.65 27.55,107.15 27.8,107.4 R8.1 | v7.05,93.4 6.8,93.15 6.05,93.15 J4.P7 | v86.8,93.65 86.8,71.9 113.3,45.4 113.3,45.15 113.55,44.9 D12.2 | v85.55,94.9 85.05,95.4 85.05,96.15 TP6.TP
  Bottom 0.127: v33.05,58.15 31.55,59.65 v9.3,59.65 | v7.05,93.4 9.05,93.4 | 9.05,93.4 14.3,93.4 v27.55,106.65 34.8,99.4 81.05,99.4 v85.55,94.9 v86.8,93.65 | 9.05,93.4 v9.05,93.15
MOSI  (via drill 0.3)
  Top 0.127: v82.3,14.9 82.3,15.65 J2.14 | 121.3,41.4 120.3,40.4 120.3,38.9 120.8,38.4 120.8,28.36 116.92,24.48 116.13,24.48 v112.3,20.65 | v142.05,46.15 142.05,51.65 149.55,59.15 TP7.TP | v122.3,41.65 121.3,41.65 121.3,41.4 | 121.3,41.4 D11.2 | 46.05,62.9 45.55,62.4 45.55,56.65 44.8,55.9 | 46.05,62.9 65.8,82.65 65.8,90.9 58.55,98.15 58.55,107.4 53.05,107.4 R7.1 | 44.8,55.9 44.55,55.65 U1.5 | v15.55,44.65 15.55,43.65 15.3,43.4 U2.7 | 44.8,55.9 44.8,54.15 v43.8,53.15 43.8,34.65 v62.3,16.15 | v7.05,88.65 6.05,88.65 J4.P3 | 46.05,62.9 v45.3,63.65
  Bottom 0.127: v82.3,14.9 83.05,15.65 88.55,15.65 | 88.55,15.65 107.3,15.65 v112.3,20.65 | v142.05,46.15 137.55,41.65 v122.3,41.65 | v15.55,44.65 24.05,53.15 v43.8,53.15 | v7.05,88.65 32.05,63.65 v45.3,63.65 | 88.55,15.65 88.55,13.4 65.05,13.4 v62.3,16.15
N$2  (via drill 0.3)
  Top 0.127: C1_BAT1.1 114.8,27.9 115.55,28.65 115.55,29.9 D2.1 115.8,30.15 116.3,30.65 118.55,30.65 | 118.55,30.65 119.3,30.65 IC4.3 | 118.55,30.65 118.55,32.4 119.3,32.4 IC4.1 119.55,32.65 v120.3,33.4 | v130.3,37.65 131.3,37.65 Q1.2
  Bottom 0.127: v130.3,37.65 126.05,33.4 v120.3,33.4
N$3  (via drill 0.3)
  Top 0.127: v72.55,43.4 67.8,38.65 67.8,29.15 67.55,28.9 R2-USB1.2 | v163.05,53.15 164.05,53.15 J1.A5
  Bottom 0.127: v72.55,43.4 75.55,46.4 141.55,46.4 148.3,53.15 v163.05,53.15
N$4  (via drill 0.3)
  Top 0.127: v71.05,25.4 68.8,23.15 68.8,17.9 R2-USB.1 | v166.05,54.9 164.8,56.15 164.3,56.15 J1.B5
  Bottom 0.127: v71.05,25.4 72.05,26.4 74.55,26.4 75.3,27.15 93.05,27.15 94.3,28.4 146.3,28.4 166.05,48.15 v166.05,54.9
N$5  (via drill 0.3)
  Top 0.127: v127.55,23.4 145.3,5.65 145.3,4.4 145.8,3.9 C4.1 | v91.8,23.65 88.8,26.65 88.8,27.4 D4.1 88.55,27.65 88.55,29.9 v85.05,33.4 | v83.3,35.15 80.05,38.4 D3.2
  Bottom 0.127: v127.55,23.4 127.3,23.65 v91.8,23.65 | v85.05,33.4 v83.3,35.15
N$7  (via drill 0.3)
  Top 0.127: v77.05,16.9 77.05,15.9 J2.24 | v83.3,17.65 83.8,18.15 83.8,20.15 84.8,21.15 EPD_C12.2
  Bottom 0.127: v77.05,16.9 77.8,17.65 v83.3,17.65
N$8  (via drill 0.3)
  Top 0.127: v127.8,32.65 131.55,32.65 CHG_LED.C | v63.3,30.15 62.8,29.65 62.8,14.65 R1_BAT.1
  Bottom 0.127: v63.3,30.15 77.76,30.15 77.98,30.37 125.52,30.37 v127.8,32.65
N$9  (via drill 0.3)
  Top 0.127: v65.3,41.65 63.8,40.15 63.8,14.65 R1_BAT.2 | v122.8,42.15 123.8,43.15 MCP73831.1
  Bottom 0.127: v65.3,41.65 65.8,42.15 v122.8,42.15
N$10  (via drill 0.3)
  Top 0.127: v72.55,42.65 68.55,38.65 68.55,27.15 67.8,26.4 67.8,14.4 65.8,12.4 R2_BAT.2 | v120.8,42.65 121.3,43.15 MCP73831.5
  Bottom 0.127: v120.8,42.65 v72.55,42.65
N$11  (via drill 0.3)
  Top 0.127: v77.8,18.15 77.8,15.9 J2.23 | v87.8,20.65 88.55,20.65 88.55,20.9 EPD_C11.2
  Bottom 0.127: v77.8,18.15 85.3,18.15 v87.8,20.65
N$12  (via drill 0.3)
  Top 0.127: v78.3,20.9 78.3,15.9 J2.22 | v87.3,21.9 92.05,21.9 92.05,21.15 EPD_C10.2
  Bottom 0.127: v78.3,20.9 79.3,21.9 v87.3,21.9
N$13  (via drill 0.3)
  Top 0.127: v78.8,14.9 78.8,15.65 J2.21 | v96.8,20.4 97.55,21.15 EPD_C9.2
  Bottom 0.127: v78.8,14.9 80.05,16.15 92.55,16.15 v96.8,20.4
N$14  (via drill 0.3)
  Top 0.127: v81.3,12.9 79.3,14.9 79.3,15.65 J2.20 | v149.3,21.15 149.3,36.4 149.55,36.65 151.3,36.65 151.3,37.65 EPD_C8.2
  Bottom 0.127: v81.3,12.9 141.05,12.9 v149.3,21.15
N$15  (via drill 0.3)
  Top 0.127: v149.8,31.15 149.8,34.4 150.55,35.15 151.3,35.15 151.3,35.9 EPD_C7.2 | J2.19 79.73,15.76 79.73,21.08 v82.3,23.65
  Bottom 0.127: v82.3,23.65 82.8,24.15 142.8,24.15 v149.8,31.15
N$16
  Top 0.127: J2.18 80.3,15.9 80.3,18.65 82.05,20.4 82.05,21.15 EPD_C6.2
N$18  (via drill 0.3)
  Top 0.127: v65.3,90.65 55.3,100.65 55.3,100.9 52.05,100.9 51.05,101.9 IC1.5 | v111.3,45.65 v89.8,67.15 | v138.8,43.9 141.55,41.15 142.05,41.15 C_DELAY.1
  Bottom 0.127: v65.3,90.65 88.8,67.15 v89.8,67.15 | v111.3,45.65 113.05,43.9 v138.8,43.9
N$24  (via drill 0.3)
  Top 0.127: v90.3,11.15 86.8,14.65 86.8,15.65 J2.5 | v139.3,10.65 144.55,5.4 144.55,5.15 EPD_C2.2
  Bottom 0.127: v90.3,11.15 90.8,10.65 v139.3,10.65
N$25  (via drill 0.3)
  Top 0.127: v72.55,32.65 69.05,29.15 69.05,27.4 69.8,27.4 R_CAPACITOR.1 | v79.05,37.9 79.05,51.15 87.8,59.9 87.8,63.65 88.55,64.4 88.55,64.65 D7.1
  Bottom 0.127: v72.55,32.65 77.8,37.9 v79.05,37.9
N$26
  Top 0.127: J2.4 87.3,15.9 87.3,16.15 90.05,18.9 94.8,18.9 94.8,20.4 95.3,20.9 95.8,20.9 EPD_C1.2
RESE  (via drill 0.3)
  Top 0.127: v87.3,14.9 87.55,15.15 87.55,15.65 J2.3 | v66.05,16.65 65.8,16.9 65.8,17.4 Q3.2 | v37.8,21.65 34.05,21.65 R3.2
  Bottom 0.127: v87.3,14.9 86.8,14.4 68.3,14.4 v66.05,16.65 42.8,16.65 v37.8,21.65
RESE'
  Top 0.127: R1.2 21.05,36.65 25.3,36.65 34.8,27.15 34.8,24.9 33.05,23.15 33.05,21.4 R3.1 34.05,20.4 34.05,19.65 56.05,19.65 62.55,13.15 62.55,12.9 63.05,12.4 SJ1.2
RESET  (via drill 0.3)
  Top 0.127: R_RESET.1 20.3,107.65 21.55,108.9 22.3,108.9 22.3,108.65 RESET_BUTTON.4 22.55,108.65 25.8,108.65 RESET_BUTTON.3 26.05,108.4 26.05,108.15 v27.05,108.15 | v45.05,101.9 48.05,101.9 IC1.1 | C5.1 33.8,25.4 10.3,25.4 10.3,43.15 U2.3 10.05,43.4 10.05,44.4 v9.3,45.15
  Bottom 0.127: v45.05,101.9 38.8,108.15 v27.05,108.15 12.8,93.9 6.8,93.9 6.55,93.65 6.55,45.15 v9.3,45.15
RTC_RST  (via drill 0.3)
  Top 0.127: v23.05,62.15 23.05,60.9 U2.16 | v86.3,62.15 86.8,61.65 86.8,61.15 U3.4
  Bottom 0.127: v86.3,62.15 v23.05,62.15
RX  (via drill 0.3)
  Top 0.127: v44.05,92.65 13.05,61.65 13.05,61.15 12.8,60.9 U2.24 | v75.8,98.4 76.8,99.4 76.8,99.9 TP2.TP
  Bottom 0.127: v44.05,92.65 49.8,98.4 v75.8,98.4
SCK  (via drill 0.3)
  Top 0.127: 132.3,55.9 140.3,63.9 140.3,64.15 141.05,64.9 143.55,64.9 143.55,63.15 144.55,62.15 148.8,62.15 148.8,62.4 149.55,63.15 TP8.TP | 132.3,55.9 131.8,55.4 131.8,48.15 127.55,48.15 D10.2 | v82.05,17.15 82.05,16.9 82.55,16.4 82.55,15.9 J2.13 | v57.8,19.9 43.3,34.4 43.3,42.15 | 43.3,55.4 43.3,42.15 | 43.3,55.4 44.3,56.4 44.3,56.65 U1.6 | v67.8,87.15 67.8,107.4 R6.1 | v44.8,64.15 43.3,62.65 43.3,55.4 | v14.3,42.15 14.3,42.9 14.05,43.15 U2.6 | 43.3,42.15 v43.05,42.15 | v7.05,90.9 6.05,90.9 J4.P5 | 132.3,55.9 130.05,58.15 v130.05,58.4
  Bottom 0.127: v82.05,17.15 78.05,17.15 77.3,16.4 67.05,16.4 63.55,19.9 v57.8,19.9 | v43.05,42.15 v14.3,42.15 | v7.05,90.9 33.8,64.15 v44.8,64.15 v67.8,87.15 88.3,66.65 121.8,66.65 v130.05,58.4
SCL  (via drill 0.3)
  Top 0.127: U4.7 134.8,47.4 136.3,47.4 v136.3,28.9 136.3,16.57 144.97,7.9 148.3,7.9 v148.3,11.15 148.3,11.4 147.8,11.9 SENSOR2.4 | v157.8,20.65 164.3,20.65 J3.4 | v77.8,28.15 75.55,25.9 R2-PINH.1 | v83.3,29.15 83.8,29.65 83.8,43.9 89.55,49.65 90.8,49.65 90.8,51.4 U3.16 | v35.8,38.9 18.05,56.65 18.05,60.4 17.8,60.65 U2.20
  Bottom 0.127: v148.3,11.15 v157.8,20.65 | v35.8,38.9 53.8,38.9 63.05,29.65 76.3,29.65 v77.8,28.15 78.8,29.15 v83.3,29.15 83.55,28.9 v136.3,28.9
SDA  (via drill 0.3)
  Top 0.127: 146.8,12.65 138.3,21.15 138.3,47.9 134.8,47.9 U4.8 134.55,47.9 v133.05,49.4 | 146.8,12.65 146.8,11.9 SENSOR2.3 | v153.8,19.65 164.3,19.65 J3.3 | 146.8,12.65 v147.05,12.9 | v94.05,49.4 94.8,49.4 R1_PINH.1 | v89.8,50.15 89.55,50.4 89.55,51.4 U3.15 | v21.3,57.65 19.3,59.65 19.3,60.65 U2.19
  Bottom 0.127: v147.05,12.9 v153.8,19.65 | v21.3,57.65 24.8,54.15 85.8,54.15 v89.8,50.15 93.3,50.15 v94.05,49.4 v133.05,49.4
SRC  (via drill 0.3)
  Top 0.127: v67.3,26.4 67.3,19.9 65.3,19.9 Q3.3 | v75.8,28.65 76.3,29.15 76.3,29.95 | 76.3,29.95 76.3,32.15 L1.1 | v92.3,29.65 92.3,31.15 D5.2 | C4.2 145.8,5.15 145.8,6.71 127.8,24.71 v127.8,29.4 | v78.15,29.95 76.3,29.95
  Bottom 0.127: v67.3,26.4 69.55,28.65 v75.8,28.65 | v127.8,29.4 127.55,29.65 v92.3,29.65 92,29.95 v78.15,29.95
SS_SD  (via drill 0.3)
  Top 0.127: 7.3,88.15 6.8,87.65 6.3,87.65 J4.P2 | 7.3,88.15 8.05,88.9 8.05,98.9 R10.1 | v95.05,22.4 104.05,31.4 104.05,31.65 113.05,31.65 D8.2 | v12.3,41.65 11.55,42.4 11.55,43.15 U2.4 11.3,43.4 11.3,44.4 6.55,49.15 6.55,61.65 7.55,62.65 7.55,87.9 7.3,88.15
  Bottom 0.127: v95.05,22.4 33.8,22.4 14.55,41.65 v12.3,41.65
TX  (via drill 0.3)
  Top 0.127: v44.05,93.9 11.8,61.65 11.8,61.15 11.55,60.9 U2.25 | v72.05,98.9 73.05,99.9 TP1.TP
  Bottom 0.127: v44.05,93.9 49.05,98.9 v72.05,98.9
USB_D+  (via drill 0.3)
  Top 0.127: v143.55,43.15 147.8,43.15 D1.1 | v26.55,41.15 24.3,43.4 U2.14
  Bottom 0.127: v143.55,43.15 141.55,41.15 v26.55,41.15
USB_D-  (via drill 0.3)
  Top 0.127: v145.3,41.4 147.8,41.4 D1.3 | v24.8,40.65 23.05,42.4 23.05,43.15 U2.13
  Bottom 0.127: v145.3,41.4 144.55,40.65 v24.8,40.65
VBAT  (via drill 0.3)
  Top 0.127: 132.55,46.9 132.55,47.4 U4.2 | v75.3,30.65 75.3,27.65 74.55,26.9 74.55,20.15 72.3,20.15 C2_BAT.1 | v130.05,39.15 130.3,39.4 130.3,39.9 Q1.3 130.55,40.15 130.55,46.9 v131.8,46.9 132.55,46.9 | 132.55,46.9 U4.3 | v125.05,39.4 125.05,45.15 124.05,45.15 MCP73831.3 | v146.3,55.15 149.55,55.15 TP3.TP
  Bottom 0.127: v75.3,30.65 77.55,32.9 119.05,32.9 125.3,39.15 | v130.05,39.15 125.3,39.15 | 125.3,39.15 v125.05,39.4 | v146.3,55.15 138.05,46.9 v131.8,46.9
VBUS  (via drill 0.3)
  Top 0.127: v74.05,25.4 74.05,24.9 71.05,21.9 71.05,20.15 69.8,20.15 C1_BAT.1 | v92.55,26.15 95.55,29.15 95.55,29.9 C5_USB.1 | v90.3,26.4 90.3,47.9 R1_PWRUSB.2 | 151.05,42.4 151.3,42.65 151.3,43.15 152.3,44.15 C4_USB.1 | 151.05,42.4 150.55,42.4 D1.5 | 151.05,42.4 152.05,41.4 152.05,33.65 151.55,33.15 PFMF.050.1.2 151.3,33.15 v150.3,33.15 | 132.55,33.15 132.55,34.15 129.55,37.15 129.55,37.65 Q1.1 129.3,37.9 125.55,41.65 125.55,45.15 121.55,49.15 | 132.55,33.15 132.55,31.4 131.8,31.4 CHG_LED.A | 121.55,49.15 121.55,45.4 MCP73831.4 121.3,45.15 121.3,44.9 120.3,43.9 120.3,42.15 119.8,41.65 119.8,36.4 115.8,32.4 D2.2 115.55,32.15 115.55,31.65 114.8,30.9 114.8,29.36 113.82,28.38 113.82,27.48 113.52,27.18 112.92,27.18 v112.76,27.02 | 121.55,49.15 121.55,50.65 134.05,63.15 TP14.TP | 132.55,33.15 v132.8,33.15
  Bottom 0.127: v74.05,25.4 74.8,26.15 90.3,26.15 | 90.3,26.15 v92.55,26.15 93.42,27.02 v112.76,27.02 | 90.3,26.15 v90.3,26.4 | v132.8,33.15 v150.3,33.15
VRTC  (via drill 0.3)
  Top 0.127: 97.05,49.4 95.8,49.4 95.8,51.15 93.8,53.15 88.3,53.15 88.3,51.65 U3.14 | 97.05,49.4 C10_SUPERCAP.2 | R_CAPACITOR.2 70.8,28.65 70.8,26.4 v72.8,24.4 | C8.1 93.8,19.65 93.05,20.4 93.05,21.65 v91.8,22.9 97.05,28.15 97.05,49.4
  Bottom 0.127: v72.8,24.4 74.3,22.9 v91.8,22.9
VUSB  (via drill 0.3)
  Top 0.127: 164.05,52.15 164.05,51.9 J1.A4 | 164.05,56.9 164.05,56.65 J1.B4 | 162.55,52.15 164.05,52.15 | 162.55,52.15 162.55,55.9 163.55,56.9 164.05,56.9 | 164.05,52.15 J1.B9 | 164.05,56.9 J1.A9 | 162.55,52.15 152.55,42.15 v152.55,39.4 | v148.05,34.9 147.05,33.9 147.05,33.15 PFMF.050.1.1
  Bottom 0.127: v148.05,34.9 v152.55,39.4